# Altium PCB SG_CAN_Board2.PcbDoc (part 2 of 2)
Units mil, origin at the board's own origin, x right, y up, seen from the top; angles counter-clockwise.
Board outline 6000 x 2800 mil, 4 copper layers (Top Layer, Int1 (GND), Int2 (PWR), Bottom Layer), stack 53.911 mil thick; 153 components, 115 nets, 479 pads, 87 vias.
Unrouted connection lines stored in the file: 153.
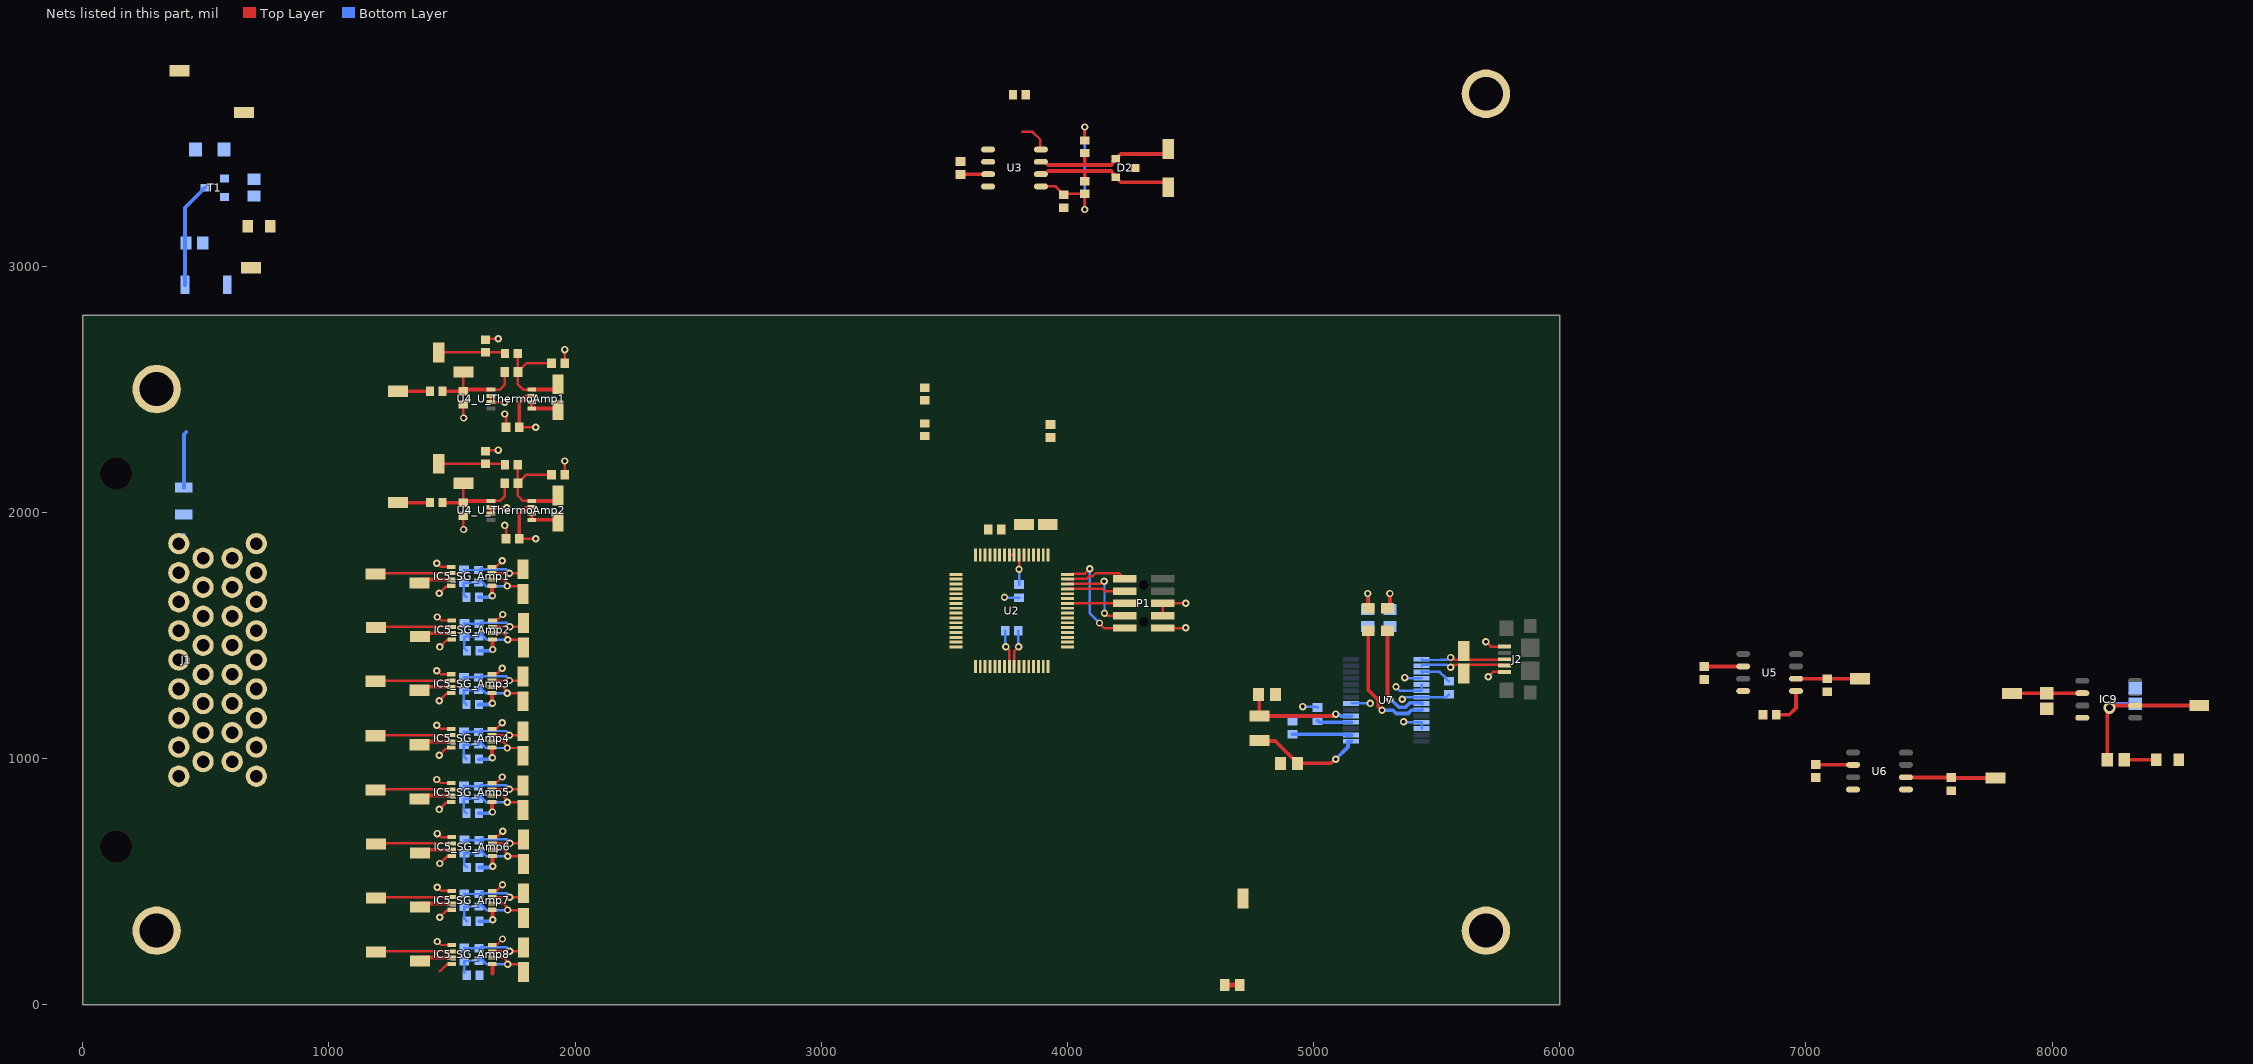
[diagram p4: the nets of this part, all layers, seen from the top]

## Part data
C5 C20 C21 C22 C24: library part 583, Dielectric=Ceramic, Manufacturer_id=1, Package="CAP 0603/1608", Voltage_Rating=25V, Created_By="Nick Mah", Created_Date=10/20/2018, Drawer_id=1, idCapacitor=583, Name="Cap_0.10uf_25V_CAP 0603/1608"
C6 C9_U_ThermoAmp1 C9_U_ThermoAmp2: library part 223, Dielectric=Ceramic, Manufacturer_id=1, Package="CAP 0603/1608", Voltage_Rating=16V, Created_By="Nick Mah", Created_Date=10/20/2018, Drawer_id=1, idCapacitor=223, Name="Cap_0.10uf_16V_CAP 0603/1608"
C7: library part 943, Dielectric=Ceramic, Manufacturer_id=1, Package="CAP 0603/1608", Voltage_Rating=50V, Created_By="Nick Mah", Created_Date=10/20/2018, Drawer_id=1, idCapacitor=943, Name="Cap_0.10uf_50V_CAP 0603/1608"
C8_U_ThermoAmp1 C8_U_ThermoAmp2 C12_U_ThermoAmp1 C12_U_ThermoAmp2: library part 193, Dielectric=Ceramic, Manufacturer_id=1, Package="CAP 0603/1608", Voltage_Rating=16V, Created_By="Nick Mah", Created_Date=10/20/2018, Drawer_id=1, idCapacitor=193, Name="Cap_1000pf_16V_CAP 0603/1608"
C10_U_ThermoAmp1 C10_U_ThermoAmp2: library part 217, Dielectric=Ceramic, Manufacturer_id=1, Package="CAP 0603/1608", Voltage_Rating=16V, Created_By="Nick Mah", Created_Date=10/20/2018, Drawer_id=1, idCapacitor=217, Name="Cap_0.010uf_16V_CAP 0603/1608"
C11: library part 929, Dielectric=Ceramic, Manufacturer_id=1, Package="CAP 0603/1608", Voltage_Rating=50V, Created_By="Nick Mah", Created_Date=10/20/2018, Drawer_id=1, idCapacitor=929, Name="Cap_4700pf_50V_CAP 0603/1608"
C13 C14: library part 589, Dielectric=Ceramic, Manufacturer_id=1, Package="CAP 0603/1608", Voltage_Rating=25V, Created_By="Nick Mah", Created_Date=10/20/2018, Drawer_id=1, idCapacitor=589, Name="Cap_1.0uf_25V_CAP 0603/1608"
C15 C17: library part 591, Dielectric=Ceramic, Manufacturer_id=1, Package="CAP 0603/1608", Voltage_Rating=25V, Created_By="Nick Mah", Created_Date=10/20/2018, Drawer_id=1, idCapacitor=591, Name="Cap_2.2uf_25V_CAP 0603/1608"
C16: library part 237, Dielectric=Ceramic, Manufacturer_id=1, Package="CAP 0603/1608", Voltage_Rating=16V, Created_By="Nick Mah", Created_Date=10/20/2018, Drawer_id=1, idCapacitor=237, Name="Cap_22uf_16V_CAP 0603/1608"
C18 C19: library part 711, Dielectric=Ceramic, Manufacturer_id=1, Package="CAP 0805/2012", Voltage_Rating=25V, Created_By="Nick Mah", Created_Date=10/20/2018, Drawer_id=1, idCapacitor=711, Name="Cap_2.2uf_25V_CAP 0805/2012"
C23: library part 529, Dielectric=Ceramic, Manufacturer_id=1, Package="CAP 0603/1608", Voltage_Rating=25V, Created_By="Nick Mah", Created_Date=10/20/2018, Drawer_id=1, idCapacitor=529, Name="Cap_100pf_25V_CAP 0603/1608"
C28_SG_Amp1 C28_SG_Amp2 C28_SG_Amp3 C28_SG_Amp4 C28_SG_Amp5 C28_SG_Amp6 C28_SG_Amp7 C28_SG_Amp8: library part 578, Dielectric=Ceramic, Manufacturer_id=1, Package="CAP 0603/1608", Voltage_Rating=25V, Created_By="Nick Mah", Created_Date=10/20/2018, Drawer_id=1, idCapacitor=578, Name="Cap_0.015uf_25V_CAP 0603/1608"
D1 D4 POWER1: library part 2, Manufacturer_id=1, Package=0805, Brightness=7mcd, Drawer_id=1, Id=20mA, idLED=2, Link=https://www.digikey.com/product-detail/en/visual-communications-company-vcc/CMD17-21VGD-TR8/L62505CT-ND/254936, Name=CMD17_0805_GREEN, Vf=2.1V
D2: library part 7, "ESD Protection Diode", Manufacturer_id=1, Package=SOT-23, Power=350W, Supplier1PartNo=NUP1105LT1GOSCT-ND, ComponentLink1URL=https://www.digikey.com/product-detail/en/on-semiconductor/NUP1105LT1G/NUP1105LT1GOSCT-ND/2122067, Drawer_id=1, Ic=8A, idDiode=7, Link=https://www.digikey.com/product-detail/en/on-semiconductor/NUP1105LT1G/NUP1105LT1GOSCT-ND/2122067, MfrPartNo=NUP1105LT1G, Name=SOT-23_350W_Zener, Num_Circuits=1, Supplier1=Digikey, Type=Zener
D3: library part 1, Package=0805, Drawer_id=1, idLED=1, Manufacturer_id=1, Name=LED_0805_RED, Vf=0.7V
D5: library part 12, "DIODE SCHOTTKY 30V 5A TMINIP2", Manufacturer_id=1, MfrPartNo=DB2431200L, Package=SOD-128, Power=30V, Supplier1PartNo=DB2431200LCT-ND, ComponentLink1Description=Datasheet, ComponentLink1URL=https://industrial.panasonic.com/content/data/SC/ds/ds4/DB2431200L_E.pdf, Drawer_id=1, Ic=5A, idDiode=12, Link=https://www.digikey.com/product-detail/en/panasonic-electronic-components/DB2431200L/DB2431200LCT-ND/3884430, Name=DB2431200L, Num_Circuits=1, Supplier1=Digi-Key, Type=Schottky
D6: library part 10, "Zener Diode 14V 500mW ±5% Surface Mount SOD-123", Manufacturer_id=8, Package=SOD-123, Power=500mW, Supplier1PartNo=DDZ9701-7DICT-ND, ComponentLink1Description=Datasheet, ComponentLink1URL=https://www.diodes.com/assets/Datasheets/ds30410.pdf, Drawer_id=1, idDiode=10, Link=https://www.digikey.com/product-detail/en/diodes-incorporated/DDZ9701-7/DDZ9701-7DICT-ND/3877402, MfrPartNo=DDZ9701-7, Name=DDZ9701, Num_Circuits=1, Supplier1=Digi-Key, Type=Zener
F1: library part 5, "Fuse", Manufacturer_id=1, MfrPartNo=1206L050/15YR, Created_By=Angel, Created_Date=10/27/2018, Drawer_id=1, I_hold=500mA, I_max=100A, I_trip=1A, idFuse=5, LatestRevisionDate=17-Jul-2002, LatestRevisionNote="Re-released for DXP Platform.", Link=https://www.digikey.com/product-detail/en/littelfuse-inc/1206L050-15YR/F3733CT-ND/2486168, Name="PTC Poly Fuse Resettable", PackageDescription="Thru-Hole; 2 Leads", PackageReference=PIN-W2/E2.8, Pd_Typ=600mW, Published=8-Jun-2000, Publisher="Altium Limited", V_max=15V
IC5_SG_Amp1 IC5_SG_Amp2 IC5_SG_Amp3 IC5_SG_Amp4 IC5_SG_Amp5 IC5_SG_Amp6 IC5_SG_Amp7 IC5_SG_Amp8: library part 2, Manufacturer_id=1, MfrPartNo=LTC2053, Package=MSOP8, Supply_Voltage="2.7V to ±5.5V", Amplifier_Type=Instrumentation, Created_By="Angel Delgado", Drawer_id=1, idOp_Amp=2, Link=https://www.digikey.com/product-detail/en/linear-technology-analog-devices/LTC2053CMS8-TRPBF/LTC2053CMS8-TRPBFCT-ND/5892339, Name="Instrumentation Amplifier", Num_Circuits=1
IC9: library part 10, "IC VREF SERIES 5V 8SOIC", Manufacturer_id=1, MfrPartNo=MAX6350CSA+, Package=SOIC-8, Created_By="Albert Panuco", Drawer_id=1, idPMIC_Lin=10, Link=https://www.digikey.com/product-detail/en/maxim-integrated/MAX6350CSA/MAX6350CSA-ND/1867176, Name=MAX6350CSA+_5V_Ref, Num_Outputs=1, Output_Config=5V, Updated_By="Albert Panuco", Vin(Max)=40V, Vout(Max)=12V
J1: library part 11, "Connector Header Through Hole, Right Angle 34 position 0.118\" (3.00mm)", Manufacturer_id=5, MfrPartNo=6437288-1, Supplier1PartNo=A124384-ND, Voltage_Rating=250VDC, ComponentLink1Description=Datasheet, ComponentLink1URL=https://www.te.com/commerce/DocumentDelivery/DDEController?Action=srchrtrv&DocNm=6437288-1&DocType=Customer+Drawing&DocLang=Japanese, Drawer_id=1, idConn=11, Link=https://www.digikey.com/products/en?mpart=6437288-1&&csp=WT.z_cid%3Dsp_8004_20120425_buynow%26TE_cid%3D8004-1541898693362, Name="AMP Superseal 34 POS", Num_Contacts=34, Num_Rows=4, Pitch=3mm, Supplier1=Digi-Key
J2: library part 5, "USB Micro Type B", Manufacturer_id=1, ComponentLink1Description=Datasheet, Created_By=Aiku, Created_Date=10/20/2018, Drawer_id=1, idConn=5, Link=https://www.mouser.com/ProductDetail/TE-Connectivity-AMP/1981568-1?qs=sGAEpiMZZMulM8LPOQ%252bykzEIUPbUCiSfqsfxH3Oq%252bYo%3d, MfrPartNo=1981568-1, Name="TE USB Micro", Num_Contacts=5, Supplier1=TE
N1 U2: library part 1, Drawer_id=1, Manufacturer_id=1
  N1: idFuse=3, idShunt=1, Name="Net Tie"
  U2: idMCU=1, Name="MKE18F512VLH16 MCU"
OVP_G1 PWR_IN1 PWR_OUT1 TEST_CANN1 TEST_CANP1 TEST_CANRX1 TEST_CANTX1 TEST_USBD_N1 TEST_USBD_P1 UART_RX1 UART_TX1: library part 5, Manufacturer_id=1, Package=0603, ComponentLink1Description=Datasheet, ComponentLink1URL=https://www.te.com/commerce/DocumentDelivery/DDEController?Action=srchrtrv&DocNm=1773266&DocType=DS&DocLang=English, Drawer_id=1, idTable=5, Link=https://www.digikey.com/product-detail/en/te-connectivity-amp-connectors/RCU-0C/A106145CT-ND/3477802, MfrPartNo=RCU-0C, Name=RCU-0C_Test_Point
P1: library part 4, "2 row connector", Manufacturer_id=1, Voltage_Rating=None, ComponentLink1Description=Datasheet, Created_By=Aiku, Drawer_id=1, idConn=4, Link=https://www.digikey.com/product-detail/en/5103309-1/A33160-ND/1114898?utm_campaign=buynow&WT.z_cid=ref_octopart_dkc_buynow&utm_medium=aggregator&curr=usd&site=us&utm_source=octopart, MfrPartNo=5103309-1, Name=CONN_TE_2X5POS, Num_Contacts=10, Num_Rows=2, Pitch=2.54mm
R4 R20_SG_Amp1 R20_SG_Amp2 R20_SG_Amp3 R20_SG_Amp4 R20_SG_Amp5 R20_SG_Amp6 R20_SG_Amp7 R20_SG_Amp8: library part 313, Manufacturer_id=1, Package=0603, Power=1/10W, Tolerance=1%, ComponentLink1Description=Datasheet, Created_By="Nick Mah", Created_Date=2018-10-20, Drawer_id=1, idResistor=313, Name=Res_10k_0603_1/10W_1%, Supplier 1=Digi-Key
R5: library part 1393, Manufacturer_id=1, Package=0603, Power=1/10W, Tolerance=5%, ComponentLink1Description=Datasheet, Created_By="Nick Mah", Created_Date=2018-10-20, Drawer_id=1, idResistor=1393, Name=Res_10k_0603_1/10W_5%, Supplier 1=Digi-Key
R6_U_ThermoAmp1 R6_U_ThermoAmp2 R11_U_ThermoAmp1 R11_U_ThermoAmp2: library part 2317, Manufacturer_id=1, Package=0603, Power=1/10W, Tolerance=10%, ComponentLink1Description=Datasheet, Created_By="Nick Mah", Created_Date=2018-10-20, Drawer_id=1, idResistor=2317, Name=Res_10k_0603_1/10W_10%, Supplier 1=Digi-Key
R7 R9 R15 R16: library part 721, Manufacturer_id=1, Package=0805, Power=1/4W, Tolerance=1%, ComponentLink1Description=Datasheet, Created_By="Nick Mah", Created_Date=2018-10-20, Drawer_id=1, idResistor=721, Name=Res_1.0k_0805_1/4W_1%, Supplier 1=Digi-Key
R8: library part 2293, Manufacturer_id=1, Package=0603, Power=1/10W, Tolerance=10%, ComponentLink1Description=Datasheet, Created_By="Nick Mah", Created_Date=2018-10-20, Drawer_id=1, idResistor=2293, Name=Res_100_0603_1/10W_10%, Supplier 1=Digi-Key
R10_U_ThermoAmp1 R10_U_ThermoAmp2: library part 1441, Manufacturer_id=1, Package=0603, Power=1/10W, Tolerance=5%, ComponentLink1Description=Datasheet, Created_By="Nick Mah", Created_Date=2018-10-20, Drawer_id=1, idResistor=1441, Name=Res_1.0M_0603_1/10W_5%, Supplier 1=Digi-Key
R12 R13: library part 1340, Manufacturer_id=1, Package=0603, Power=1/10W, Tolerance=5%, ComponentLink1Description=Datasheet, Created_By="Nick Mah", Created_Date=2018-10-20, Drawer_id=1, idResistor=1340, Name=Res_62_0603_1/10W_5%, Supplier 1=Digi-Key
R14 R34: library part 497, Manufacturer_id=1, Package=0805, Power=1/10W, Tolerance=1%, ComponentLink1Description=Datasheet, Created_By="Nick Mah", Created_Date=2018-10-20, Drawer_id=1, idResistor=497, Name=Res_470_0805_1/10W_1%, Supplier 1=Digi-Key
R24_SG_Amp1 R24_SG_Amp2 R24_SG_Amp3 R24_SG_Amp4 R24_SG_Amp5 R24_SG_Amp6 R24_SG_Amp7 R24_SG_Amp8: library part 241, Manufacturer_id=1, Package=0603, Power=1/10W, Tolerance=1%, ComponentLink1Description=Datasheet, Created_By="Nick Mah", Created_Date=2018-10-20, Drawer_id=1, idResistor=241, Name=Res_10_0603_1/10W_1%, Supplier 1=Digi-Key
R33: library part 545, Manufacturer_id=1, Package=0805, Power=1/10W, Tolerance=1%, ComponentLink1Description=Datasheet, Created_By="Nick Mah", Created_Date=2018-10-20, Drawer_id=1, idResistor=545, Name=Res_47k_0805_1/10W_1%, Supplier 1=Digi-Key
T1: library part 6, "MOSFET N-CHANNEL 30V 5A SOT23", Manufacturer_id=1, Package=SOT-23, Created_By=Angel, Drawer_id=1, Id=2.8A, idFETs=6, Link=https://www.digikey.com/product-detail/en/diodes-incorporated/DMG2302UK-7/DMG2302UK-7DICT-ND/6010163, MfrPartNo=DMG2302UK-7, Name=DMG2302UK-7, Num_Circuits=1, Rds_On=90mOhm, Supplier1=Digi-Key, Vdss=20V, Vgs(Max)=1V, Vgs(typ)=800mV
TP5_SG_Amp1 TP5_SG_Amp2 TP5_SG_Amp3 TP5_SG_Amp4 TP5_SG_Amp5 TP5_SG_Amp6 TP5_SG_Amp7 TP5_SG_Amp8 TP14_SG_Amp1 TP14_SG_Amp2 TP14_SG_Amp3 TP14_SG_Amp4 TP14_SG_Amp5 TP14_SG_Amp6 TP14_SG_Amp7 TP14_SG_Amp8 TP28_SG_Amp1 TP28_SG_Amp2 TP28_SG_Amp3 TP28_SG_Amp4 TP28_SG_Amp5 TP28_SG_Amp6 TP28_SG_Amp7 TP28_SG_Amp8 TP30_SG_Amp1 TP30_SG_Amp2 TP30_SG_Amp3 TP30_SG_Amp4 TP30_SG_Amp5 TP30_SG_Amp6 TP30_SG_Amp7 TP30_SG_Amp8 TP38_U_ThermoAmp1 TP38_U_ThermoAmp2 TP39_U_ThermoAmp1 TP39_U_ThermoAmp2 TP40 TP41_U_ThermoAmp1 TP41_U_ThermoAmp2 TP42_U_ThermoAmp1 TP42_U_ThermoAmp2 TP43_U_ThermoAmp1 TP43_U_ThermoAmp2 TP44 TP45 TP46 TP47: library part 14, "Test point", Manufacturer_id=1, Supplier1PartNo=None, ComponentLink1Description=Null, ComponentLink1URL=Null, Created_By=Graydon, Created_Date=11/10/2018, Drawer_id=1, idConn=14, Link=https://www.digikey.com/product-detail/en/te-connectivity-amp-connectors/RCU-0C/A106145CT-ND/3477802, MfrPartNo=RCU-0C, Name=RCU-0C, Num_Contacts=1, Num_Rows=1, Package=RCU-0C, Supplier1=None, Updated_By=Null
U3: library part 5, Manufacturer_id=1, MfrPartNo=MCP2561, Package=SOIC-8, Created_By="Angel Delgado", Data_Rate=1Mbps, Drawer_id=1, idIC_Interface=5, Link=https://www.digikey.com/product-detail/en/microchip-technology/MCP2561T-E-SN/MCP2561T-E-SNCT-ND/5148846, Name="CAN Transceiver", Num_Circuits=1, Protocol=CAN, Type=Transceiver, Vin(Max)=5.5V, Vin(Min)=4.5V
U4_U_ThermoAmp1 U4_U_ThermoAmp2: library part 3, "IC THRMOCPLE COLD JNC COMP 8MSOP", Manufacturer_id=1, MfrPartNo=AD8494CRMZ, Package=MSOP8, Supplier1PartNo=AD8494CRMZ-ND, Supply_Voltage=+-18,2.7-36, Amplifier_Type="Thermocouple Amplifier", ComponentLink1Description=Datasheet, ComponentLink1URL=http://www.digchip.com/data/041/041-93390-AD8494.pdf, Created_By="Nick Mah", Drawer_id=1, idOp_Amp=3, Link=https://www.digikey.com/product-detail/en/analog-devices-inc/AD8494CRMZ/AD8494CRMZ-ND/2606669, Name="AD8494 Thermocouple Amplifier", Num_Circuits=1, Supplier1=Digi-Key
U5: library part 9, "Series Voltage Reference IC ±0.1% 10mA 8-SOIC", Current_Rating=10mA, Dropout_Voltage=200mV, Manufacturer_id=1, MfrPartNo=REF5025AIDR, Package=SOIC-8, Power=Reference, Supplier1PartNo=296-39165-2-ND, ComponentLink1Description=Datasheet, ComponentLink1URL=http://www.ti.com/lit/ds/symlink/ref5020.pdf, Drawer_id=1, idPMIC_Lin=9, Link=https://www.digikey.com/product-detail/en/texas-instruments/REF5025AIDR/296-39165-2-ND/1900163, Name=REF5025_2.5V_Reg, Num_Outputs=1, Supplier1=Digi-Key, Vin(Max)=18V, Vin(Min)=2.7V, Vout(Max)=2.5V, Vout(Min)=2.5V, Vout_Type=Fixed
U6: library part 2, Manufacturer_id=1, Drawer_id=1, idIC_Misc=2, Name="Voltage Ref LT1236-5"
U7: library part 3, Manufacturer_id=1, Created_By=Kyle, Drawer_id=1, idIC_Interface=3, Link=https://www.digikey.com/product-detail/en/ftdi-future-technology-devices-international-ltd/FT232RL-REEL/768-1007-1-ND/1836402, MfrPartNo=FT232RL, Name="USB FTDI", Protocol=UART, Vin(Max)=5.25, Vin(Min)=3.3

## Free pads (board coordinates)
  round 196.85 hole 137.8: 1(300,300) 1(300,2500) 1(5700,300) 1(5700,3700)

## Via types
v1: diameter 30, hole 15, Top Layer to Bottom Layer, 86 vias
v2: diameter 50, hole 28, Top Layer to Bottom Layer, 1 vias

## Nets (pads, with @x,y where several pads share a name; then routed paths per layer and width w, separated by ;. In a path a pad name is that pad's centre, name@x,y a point inside that pad or via, vN(x,y) a via of type N, cw(c..) or ccw(c..) an arc to the next point about the centre after c; other vN are vias at no path point)
2.5VREF: C16.2 IC5_SG_Amp1.5 IC5_SG_Amp2.5 IC5_SG_Amp3.5 IC5_SG_Amp4.5 IC5_SG_Amp5.5 IC5_SG_Amp6.5 IC5_SG_Amp7.5 IC5_SG_Amp8.5 R24_SG_Amp1.1 R24_SG_Amp2.1 R24_SG_Amp3.1 R24_SG_Amp4.1 R24_SG_Amp5.1 R24_SG_Amp6.1 R24_SG_Amp7.1 R24_SG_Amp8.1 TP44.1 U5.6 | length 988.2
  Top Layer w15: IC5_SG_Amp5.5@1662.24,823.23 1662.24,783.8 v1(1663.88,782.17) ; IC5_SG_Amp4.5@1662.24,1043.3 1662.24,1003.87 v1(1663.88,1002.24) ; IC5_SG_Amp3.5@1662.24,1265.08 1662.24,1225.65 v1(1663.88,1224.02) ; IC5_SG_Amp1.5@1662.24,1701.22 1662.24,1661.79 v1(1663.88,1660.15) ; 1663.88,125.65 IC5_SG_Amp8.5@1663.88,165.08 ; IC5_SG_Amp7.5@1663.88,385.08 1663.88,345.65 v1(1665.51,344.02) ; IC5_SG_Amp6.5@1664.17,603.3 1664.17,563.87 v1(1665.81,562.24) ; IC5_SG_Amp2.5@1664.17,1483.3 1664.17,1443.87 v1(1665.81,1442.24) ; U5.6@6959.88,1323.58 C16.2@7086.57,1323.58 TP44.1@7220.36,1323.58
  Bottom Layer w15: R24_SG_Amp5.1@1609.47,776.89 1654.55,776.89 1659.82,782.17 v1(1663.88,782.17) ; R24_SG_Amp4.1@1609.47,996.96 1654.55,996.96 1659.82,1002.24 v1(1663.88,1002.24) ; R24_SG_Amp3.1@1609.47,1218.74 1654.55,1218.74 1659.82,1224.02 v1(1663.88,1224.02) ; R24_SG_Amp1.1@1609.47,1654.88 1654.55,1654.88 1659.82,1660.15 v1(1663.88,1660.15) ; R24_SG_Amp7.1@1611.1,338.74 1656.18,338.74 1661.45,344.02 v1(1665.51,344.02) ; R24_SG_Amp6.1@1611.4,556.96 1656.48,556.96 1661.75,562.24 v1(1665.81,562.24) ; R24_SG_Amp2.1@1611.4,1436.96 1656.48,1436.96 1661.75,1442.24 v1(1665.81,1442.24)
12V_Unfused: F1.1 J1.A26 PWR_IN1.1 | length 33.1
  Bottom Layer w15: J1.A26@409.13,1890.82 J1.A26@409.13,1907.4 ; J1.A26@410.71,1890.82 J1.A26@410.71,1907.4
+12: C15.2 C18.2 D5.2 D6.2 F1.2 IC9.2 PWR_OUT1.1 R34.2 T1.3 TP46.1 U6.2 | length 1096.8
  Top Layer w15: C15.2@7040,975.16 7041.57,973.58 U6.2@7191.81,973.58 ; TP46.1@7837.84,1263.58 7839.33,1265.08 C18.2@7977.84,1265.08 7977.92,1265 IC9.2@8122.72,1265
  Bottom Layer w15: F1.2@410.71,2100.63 410.71,2315.67 420.55,2325.51 ; D5.2@415.31,2923.42 415.31,3237.16 486.36,3308.21 486.36,3310.18 494.61,3318.42 T1.3@496.57,3318.42
+IN_U_ThermoAmp1: C10_U_ThermoAmp1.2 C12_U_ThermoAmp1.1 R11_U_ThermoAmp1.1 TP43_U_ThermoAmp1.1 U4_U_ThermoAmp1.8 | length 463.4
  Top Layer w10: R11_U_ThermoAmp1.1@1766.48,2645 1766.48,2570.98 C10_U_ThermoAmp1.2@1767.46,2570 ; U4_U_ThermoAmp1.8@1823.78,2498.39 1788.53,2498.39 1767.46,2519.45 C10_U_ThermoAmp1.2@1767.46,2570 ; C12_U_ThermoAmp1.1@1904.31,2605 1802.46,2605 1782.15,2584.69 1780.18,2584.69 1767.46,2571.97 C10_U_ThermoAmp1.2@1767.46,2570
  Top Layer w15: U4_U_ThermoAmp1.8@1823.78,2498.39 1915.75,2498.39 1930.89,2513.52 TP43_U_ThermoAmp1.1@1930.89,2520
+IN_U_ThermoAmp2: C10_U_ThermoAmp2.2 C12_U_ThermoAmp2.1 R11_U_ThermoAmp2.1 TP43_U_ThermoAmp2.1 U4_U_ThermoAmp2.8 | length 463.4
  Top Layer w10: R11_U_ThermoAmp2.1@1766.48,2192.44 1766.48,2118.43 C10_U_ThermoAmp2.2@1767.46,2117.44 ; U4_U_ThermoAmp2.8@1823.78,2045.83 1788.53,2045.83 1767.46,2066.89 C10_U_ThermoAmp2.2@1767.46,2117.44 ; C12_U_ThermoAmp2.1@1904.31,2152.44 1802.46,2152.44 1782.15,2132.13 1780.18,2132.13 1767.46,2119.41 C10_U_ThermoAmp2.2@1767.46,2117.44
  Top Layer w15: U4_U_ThermoAmp2.8@1823.78,2045.83 1915.75,2045.83 1930.89,2060.96 TP43_U_ThermoAmp2.1@1930.89,2067.44
-IN_U_ThermoAmp1: C8_U_ThermoAmp1.2 C10_U_ThermoAmp1.1 R6_U_ThermoAmp1.2 TP41_U_ThermoAmp1.1 U4_U_ThermoAmp1.1 | length 394
  Top Layer w10: C8_U_ThermoAmp1.2@1545.89,2491.57 TP41_U_ThermoAmp1.1@1545.89,2570 ; U4_U_ThermoAmp1.1@1658,2498.39 1694.28,2498.39 1714.31,2518.43 C10_U_ThermoAmp1.1@1714.31,2570
  Top Layer w15: R6_U_ThermoAmp1.2@1461.48,2491.57 C8_U_ThermoAmp1.2@1545.89,2491.57 1552.7,2498.39 U4_U_ThermoAmp1.1@1658,2498.39
-IN_U_ThermoAmp2: C8_U_ThermoAmp2.2 C10_U_ThermoAmp2.1 R6_U_ThermoAmp2.2 TP41_U_ThermoAmp2.1 U4_U_ThermoAmp2.1 | length 394
  Top Layer w10: C8_U_ThermoAmp2.2@1545.89,2039.02 TP41_U_ThermoAmp2.1@1545.89,2117.44 ; U4_U_ThermoAmp2.1@1658,2045.83 1694.28,2045.83 1714.31,2065.87 C10_U_ThermoAmp2.1@1714.31,2117.44
  Top Layer w15: R6_U_ThermoAmp2.2@1461.48,2039.02 C8_U_ThermoAmp2.2@1545.89,2039.02 1552.7,2045.83 U4_U_ThermoAmp2.1@1658,2045.83
AGND: C8_U_ThermoAmp1.1 C8_U_ThermoAmp2.1 C9_U_ThermoAmp1.1 C9_U_ThermoAmp2.1 C12_U_ThermoAmp1.2 C12_U_ThermoAmp2.2 C13.1 C14.1 C16.1 C18.1 C19.1 C24.1 D4.2 IC5_SG_Amp1.1 IC5_SG_Amp1.4 IC5_SG_Amp2.1 IC5_SG_Amp2.4 IC5_SG_Amp3.1 IC5_SG_Amp3.4 IC5_SG_Amp4.1 IC5_SG_Amp4.4 IC5_SG_Amp5.1 IC5_SG_Amp5.4 IC5_SG_Amp6.1 IC5_SG_Amp6.4 IC5_SG_Amp7.1 IC5_SG_Amp7.4 IC5_SG_Amp8.1 IC5_SG_Amp8.4 IC9.4 J1.A23 J1.A24 J1.A33 J1.A34 N1.1 pad.1@300,300 pad.1@300,2500 R10_U_ThermoAmp1.1 R10_U_ThermoAmp2.1 TP40.1 U2.10 U4_U_ThermoAmp1.2 U4_U_ThermoAmp1.3 U4_U_ThermoAmp2.2 U4_U_ThermoAmp2.3 U5.4 | length 1623.2
  Top Layer w10: v1(1438.36,914.41) 1439.82,914.41 1454.22,900 IC5_SG_Amp5.1@1496.46,900 ; v1(1438.36,1134.48) 1439.82,1134.48 1454.22,1120.07 IC5_SG_Amp4.1@1496.46,1120.07 ; v1(1438.36,1356.26) 1439.82,1356.26 1454.22,1341.85 IC5_SG_Amp3.1@1496.46,1341.85 ; v1(1438.36,1792.39) 1439.82,1792.39 1454.22,1777.99 IC5_SG_Amp1.1@1496.46,1777.99 ; v1(1440,256.26) 1441.45,256.26 1455.86,241.85 IC5_SG_Amp8.1@1498.09,241.85 ; v1(1440,476.26) 1441.45,476.26 1455.86,461.85 IC5_SG_Amp7.1@1498.09,461.85 ; v1(1440.3,694.48) 1441.75,694.48 1456.15,680.07 IC5_SG_Amp6.1@1498.39,680.07 ; v1(1440.3,1574.48) 1441.75,1574.48 1456.15,1560.07 IC5_SG_Amp2.1@1498.39,1560.07 ; v1(1448.36,792.64) 1475.69,819.96 1493.19,819.96 IC5_SG_Amp5.4@1496.46,823.23 ; v1(1448.36,1012.71) 1475.69,1040.03 1493.19,1040.03 IC5_SG_Amp4.4@1496.46,1043.3 ; v1(1448.36,1234.49) 1475.69,1261.81 1493.19,1261.81 IC5_SG_Amp3.4@1496.46,1265.08 ; v1(1448.36,1670.62) 1475.69,1697.95 1493.19,1697.95 IC5_SG_Amp1.4@1496.46,1701.22 ; 1450,134.49 1477.32,161.81 1494.82,161.81 IC5_SG_Amp8.4@1498.09,165.08 ; v1(1450,354.49) 1477.32,381.81 1494.82,381.81 IC5_SG_Amp7.4@1498.09,385.08 ; v1(1450.3,572.71) 1477.62,600.03 1495.12,600.03 IC5_SG_Amp6.4@1498.39,603.3 ; v1(1450.3,1452.71) 1477.62,1480.03 1495.12,1480.03 IC5_SG_Amp2.4@1498.39,1483.3 ; C8_U_ThermoAmp2.1@1545.89,1985.87 1545.89,1938.19 1546.7,1937.38 v1(1546.7,1929.96) ; C8_U_ThermoAmp1.1@1545.89,2438.43 1545.89,2390.75 1546.7,2389.94 v1(1546.7,2382.52) ; R10_U_ThermoAmp2.1@1635.89,2248.03 1640.3,2252.44 v1(1687.75,2252.44) ; R10_U_ThermoAmp1.1@1635.89,2700.59 1640.3,2705 v1(1687.75,2705) ; U4_U_ThermoAmp2.2@1658,2020.24 U4_U_ThermoAmp2.3@1658,1994.65 1681.76,2018.41 v1(1722.19,2018.41) ; U4_U_ThermoAmp1.2@1658,2472.8 U4_U_ThermoAmp1.3@1658,2447.2 v1(1714,2447.2) ; v1(1714.31,1946.42) 1714.31,1941.01 1719.31,1936.01 C9_U_ThermoAmp2.1@1719.31,1892.44 ; v1(1714.31,2398.98) 1714.31,2393.56 1719.31,2388.56 C9_U_ThermoAmp1.1@1719.31,2345 ; C12_U_ThermoAmp2.2@1957.46,2152.44 v1(1957.47,2208.19) ; C12_U_ThermoAmp1.2@1957.46,2605 v1(1957.47,2660.75)
CAN_N: D2.2 J1.A17 R12.1 TEST_CANN1.1 U3.6 | length 605.5
  Top Layer w15: U3.6@3892.17,3373.43 3909.5,3373.43 3922,3385.93 4070.47,3385.93 ; R12.1@4070.47,3344.96 4070.47,3385.93 ; TEST_CANN1.1@4409.27,3320.27 4409.74,3319.8 TEST_CANN1.1@4409.74,3304.65 ; TEST_CANN1.1@4410,3335 4404.55,3340.45 4216.67,3340.45 D2.2@4196.1,3361.02 4194.13,3361.02 4185.89,3369.27 4185.89,3377.14 4177.1,3385.93 4118.87,3385.93 4070.47,3385.93
CAN_P: D2.1 J1.A25 R13.2 TEST_CANP1.1 U3.7 | length 617.3
  Top Layer w15: U3.7@3892.17,3423.43 3909.5,3423.43 3922,3410.93 4006.28,3410.93 4070.47,3410.93 ; R13.2@4070.47,3458.78 4070.47,3410.93 ; D2.1@4185.89,3444.07 D2.1@4194.13,3435.83 ; 4216.19,3455 4205.27,3444.07 4204.35,3444.07 D2.1@4196.1,3435.83 D2.1@4194.13,3435.83 ; 4216.19,3455.45 4279.94,3455.45 ; 4279.94,3455 4280.39,3455.45 4395.33,3455.45 4410.47,3470.59 TEST_CANP1.1@4410.47,3475.59 ; 4070.47,3410.93 4108.51,3410.93 4177.1,3410.93 4185.89,3419.71 4185.89,3427.58 D2.1@4194.13,3435.83
D_N: J2.2 TEST_USBD_N1.1 U7.16 | length 378.1
  Top Layer w10: v1(5556.47,1369.79) 5561.88,1369.79 5571.88,1379.79 5586.5,1379.79 5586.88,1379.42 5592.36,1379.42 TEST_USBD_N1.1@5610,1361.78 ; TEST_USBD_N1.1@5610,1344.06 TEST_USBD_N1.1@5610,1361.78 ; J2.2@5774.68,1377.17 5771.89,1379.96 5694.81,1379.96 5694.65,1379.79 5633.5,1379.79 5633.12,1379.42 5627.64,1379.42 TEST_USBD_N1.1@5610,1361.78
  Bottom Layer w10: U7.16@5440,1376.77 5442.8,1379.57 5522.18,1379.57 5522.41,1379.79 5541.06,1379.79 5551.06,1369.79 v1(5556.47,1369.79)
D_P: J2.3 TEST_USBD_P1.1 U7.15 | length 378.1
  Top Layer w10: v1(5556.47,1409.79) 5561.88,1409.79 5571.88,1399.79 5586.5,1399.79 5586.88,1400.17 5592.36,1400.17 TEST_USBD_P1.1@5610,1417.81 ; TEST_USBD_P1.1@5610,1435.53 TEST_USBD_P1.1@5610,1417.81 ; J2.3@5774.68,1402.76 5771.89,1399.96 5686.53,1399.96 5686.36,1399.79 5633.5,1399.79 5633.12,1400.17 5627.64,1400.17 TEST_USBD_P1.1@5610,1417.81
  Bottom Layer w10: U7.15@5440,1402.36 5442.8,1399.57 5513.9,1399.57 5514.12,1399.79 5541.06,1399.79 5551.06,1409.79 v1(5556.47,1409.79)
DGND: C5.1 C6.1 C7.1 C11.1 C15.1 C17.1 C20.1 C21.1 C23.1 D2.3 D5.1 J1.A22 J1.A31 J1.A32 J2.5 N1.2 P1.3 P1.5 pad.1@5700,300 pad.1@5700,3700 POWER1.2 R8.1 R33.1 T1.2 U2.40 U3.2 U6.4 U6.5 U7.7 U7.18 U7.21 U7.25 U7.26 | length 945
  Top Layer w10: v1(3750,1453.94) 3750,1452.02 3763.94,1438.08 U2.40@3763.94,1373.62 ; P1.3@4386.77,1579.53 P1.5@4386.77,1629.53 4479.53,1629.53 v1(4480,1630) ; v1(5700,1474.13) 5720.19,1453.94 J2.5@5774.68,1453.94
  Bottom Layer w10: v1(3744.26,1654.88) 3746.18,1652.95 C5.1@3803.31,1652.95 ; C23.1@3747.21,1518.11 3747.21,1456.73 v1(3750,1453.94) ; v1(4956.14,1210.43) 5012.29,1210.43 C21.1@5016.14,1206.57 ; U7.7@5154.57,1223.23 v1(5230,1223.23) ; v1(5360,1240) 5365.41,1240 5374.23,1248.82 U7.21@5437.85,1248.82 5538.82,1248.82 C20.1@5550,1260 ; v1(5365.41,1148.22) 5367.18,1146.46 5440,1146.46 U7.26@5440,1120.87 ; v1(5370,1328.16) 5372.57,1325.59 U7.18@5440,1325.59
DVCC_5V: C5.2 C6.2 C7.2 C9_U_ThermoAmp1.2 C9_U_ThermoAmp2.2 C13.2 C19.2 C21.2 C23.2 IC9.6 J2.1 P1.1 R4.2 R5.2 R14.1 R15.2 R16.2 TP47.1 U2.7 U2.41 U3.3 U4_U_ThermoAmp1.7 U4_U_ThermoAmp2.7 U5.2 U7.4 U7.19 U7.20 | length 2140.7
  Top Layer w10: C9_U_ThermoAmp2.2@1772.46,1892.44 v1(1840,1892.45) ; C9_U_ThermoAmp1.2@1772.46,2345 v1(1840,2345.01) ; U2.41@3783.63,1373.62 3783.63,1436.07 v1(3801.5,1453.94) ; v1(3803.31,1768.3) U2.7@3803.31,1826.38 ; P1.1@4386.77,1529.53 4478.43,1529.53 v1(4480,1531.1) ; v1(5710,1332.17) 5729.41,1351.57 J2.1@5774.68,1351.57
  Top Layer w15: C9_U_ThermoAmp2.2@1772.46,1892.44 1772.46,1991.01 1799.86,2018.41 1812.73,2018.41 1814.55,2020.24 U4_U_ThermoAmp2.7@1823.78,2020.24 ; C9_U_ThermoAmp1.2@1772.46,2345 1772.46,2443.57 1799.86,2470.97 1812.73,2470.97 1814.55,2472.8 U4_U_ThermoAmp1.7@1823.78,2472.8 ; C7.2@3565.47,3371.85 3567.05,3373.43 U3.3@3677.6,3373.43 ; C13.2@6586.57,1373.58 U5.2@6745.32,1373.58 ; R14.1@8224.09,994.25 8224.09,1196.18 v2(8233.5,1205.59) 8242.91,1215 IC9.6@8337.28,1215 TP47.1@8597.84,1215
  Bottom Layer w10: C23.2@3800.36,1518.11 3800.36,1455.08 v1(3801.5,1453.94) ; C5.2@3803.31,1706.1 v1(3803.31,1768.3) ; v1(5334.61,1290.67) 5350.87,1274.41 U7.20@5437.85,1274.41 ; U7.20@5440,1274.41 U7.19@5440,1300
  Bottom Layer w15: C21.2@5016.14,1153.43 5023.11,1146.46 U7.4@5154.57,1146.46 ; v2(8233.5,1205.59) 8242.97,1205.59 8259.16,1221.77 C19.2@8337.28,1221.77
FTDI_GREEN: D1.2 U7.23 | length 520.1
  Top Layer w15: D1.2@5222.48,1518.86 5222.48,1276.71 5262.5,1236.69 5262.5,1210.77 v1(5277.6,1195.67)
  Bottom Layer w15: v1(5277.6,1195.67) 5323.01,1195.67 5336.18,1182.5 5383.82,1182.5 5396.99,1195.67 5438.03,1195.67 U7.23@5440,1197.64
FTDI_RED: D3.2 U7.22 | length 434.8
  Top Layer w15: D3.2@5300,1518.86 5300,1254.37 5310,1244.37 v1(5310,1240.31)
  Bottom Layer w15: v1(5310,1240.31) 5313.72,1240.31 5346.54,1207.5 5373.46,1207.5 5391.64,1225.67 5406.23,1225.67 5406.53,1225.37 5437.85,1225.37 U7.22@5440,1223.23
FTDI_UART_RX: R7.2 U2.47
FTDI_UART_TX: R9.2 U2.48
JTAG_RST: C22.2 P1.10 R5.1 U2.63 | length 252.7
  Top Layer w10: U2.63@4000.16,1727.95 4023.79,1727.95 4025.36,1729.53 4077.81,1729.53 4088.28,1740 4102.43,1740 4114.82,1752.4 4210.36,1752.4 P1.10@4233.23,1729.53
JTAG_TCLK: P1.4 U2.62 | length 371.2
  Top Layer w10: U2.62@4000.16,1708.27 4000.48,1708.58 4132.88,1708.58 4144.3,1720 v1(4148.74,1720) ; v1(4150.47,1590) 4151.42,1590 4161.89,1579.53 P1.4@4233.23,1579.53
  Bottom Layer w10: v1(4148.74,1720) 4150.47,1718.27 v1(4150.47,1590)
JTAG_TDI: P1.8 U2.61 | length 236.8
  Top Layer w10: U2.61@4000.16,1688.58 4141.42,1688.58 4150.47,1679.53 P1.8@4233.23,1679.53
JTAG_TDO: P1.6 U2.58 | length 233.1
  Top Layer w10: U2.58@4000.16,1629.53 P1.6@4233.23,1629.53
JTAG_TMS: P1.2 R4.1 U2.64 | length 448.3
  Top Layer w10: U2.64@4000.16,1747.95 4015.5,1747.95 4017.08,1749.53 4069.53,1749.53 v1(4090,1770) ; v1(4130,1550) 4130,1548.27 4148.74,1529.53 P1.2@4233.23,1529.53
  Bottom Layer w10: v1(4090,1770) 4090,1590 v1(4130,1550)
NetC22_1: C22.1 U7.2 | length 241.6
  Bottom Layer w15: C22.1@4913.94,1097.56 5129.45,1097.56 5131.73,1095.28 U7.2@5154.57,1095.28
NetD1_1: D1.1 R16.1 | length 117.1
  Top Layer w15: v1(5220,1670) 5220,1611.89 D1.1@5222.48,1609.41
  Bottom Layer w15: R16.1@5220,1604.53 v1@5220,1660
NetD3_1: D3.1 R15.1 | length 120.2
  Top Layer w15: D3.1@5300,1609.41 5310,1619.41 v1(5310,1670)
  Bottom Layer w15: R15.1@5310,1604.53 v1@5310,1660
NetD6_1: D6.1 OVP_G1.1 R33.2 T1.1
NetPOWER1_1: POWER1.1 R34.1
NetR7_1: R7.1 U7.5 UART_RX1.1 | length 452.1
  Top Layer w15: R7.1@4780,1255.55 4779.72,1255.28 4779.72,1172.32 UART_RX1.1@4780,1172.05 v1@5080,1172.05
  Bottom Layer w15: v1(5090,1180) 5092.87,1177.13 5105.12,1177.13 5110.79,1171.46 5153.98,1171.46 U7.5@5154.57,1172.05
NetR9_1: R9.1 U7.1 UART_TX1.1 | length 471.7
  Top Layer w15: UART_TX1.1@4780,1073.23 4777.36,1070.59 4843.85,1070.59 4915.37,999.07 4919.31,999.07 4934.45,983.94 R9.1@4934.45,980 5070.32,980 v1@5090,999.69
  Bottom Layer w15: v1(5090,996.34) 5139.99,1046.33 5139.99,1067.54 5142.13,1069.69 U7.1@5154.57,1069.69
NetU2_1: U2.1
NetU2_2: U2.2
NetU2_3: U2.3
NetU2_4: U2.4
NetU2_11: U2.11
NetU2_12: U2.12
NetU2_13: U2.13
NetU2_14: U2.14
NetU2_15: U2.15
NetU2_16: U2.16
NetU2_17: U2.17
NetU2_18: U2.18
NetU2_19: U2.19
NetU2_20: U2.38
NetU2_21: U2.49
NetU2_22: U2.22
NetU2_23: U2.23
NetU2_24: U2.24
NetU2_27: U2.34
NetU2_28: U2.37
NetU2_29: U2.50
NetU2_30: U2.33
NetU2_35: U2.35
NetU2_36: U2.36
NetU2_39: U2.39
NetU2_42: U2.42
NetU2_43: U2.43
NetU2_44: U2.44
NetU2_45: U2.45
NetU2_46: U2.46
NetU2_51: U2.51
NetU2_52: U2.52
NetU2_53: U2.53
NetU2_54: U2.54
NetU2_55: U2.55
NetU2_56: U2.56
NetU2_57: U2.57
NetU2_59: U2.59
NetU2_60: U2.60
RG_SG_Amp1: C28_SG_Amp1.1 IC5_SG_Amp1.6 R20_SG_Amp1.1 R24_SG_Amp1.2 TP28_SG_Amp1.1 | length 401.2
  Top Layer w10: IC5_SG_Amp1.6@1662.24,1726.81 1707.06,1726.81 1723.88,1709.99 v1(1723.88,1700.08) 1770.73,1700.08 TP28_SG_Amp1.1@1788.36,1682.44
  Bottom Layer w10: R24_SG_Amp1.2@1558.29,1654.88 1548.37,1664.8 C28_SG_Amp1.1@1548.37,1713.03 1606.91,1713.03 R20_SG_Amp1.1@1607.89,1714.01 1616.28,1722.4 1638.59,1700.08 v1(1723.88,1700.08)
RG_SG_Amp2: C28_SG_Amp2.1 IC5_SG_Amp2.6 R20_SG_Amp2.1 R24_SG_Amp2.2 TP28_SG_Amp2.1 | length 401.2
  Top Layer w10: IC5_SG_Amp2.6@1664.17,1508.89 1708.99,1508.89 1725.81,1492.07 v1(1725.81,1482.17) 1772.66,1482.17 TP28_SG_Amp2.1@1790.3,1464.53
  Bottom Layer w10: R24_SG_Amp2.2@1560.22,1436.96 1550.3,1446.89 C28_SG_Amp2.1@1550.3,1495.12 1608.84,1495.12 R20_SG_Amp2.1@1609.82,1496.1 1618.21,1504.48 1640.52,1482.17 v1(1725.81,1482.17)
RG_SG_Amp3: C28_SG_Amp3.1 IC5_SG_Amp3.6 R20_SG_Amp3.1 R24_SG_Amp3.2 TP28_SG_Amp3.1 | length 401.2
  Top Layer w10: IC5_SG_Amp3.6@1662.24,1290.67 1707.06,1290.67 1723.88,1273.85 v1(1723.88,1263.95) 1770.73,1263.95 TP28_SG_Amp3.1@1788.36,1246.31
  Bottom Layer w10: R24_SG_Amp3.2@1558.29,1218.74 1548.37,1228.67 C28_SG_Amp3.1@1548.37,1276.9 1606.91,1276.9 R20_SG_Amp3.1@1607.89,1277.88 1616.28,1286.26 1638.59,1263.95 v1(1723.88,1263.95)
RG_SG_Amp4: C28_SG_Amp4.1 IC5_SG_Amp4.6 R20_SG_Amp4.1 R24_SG_Amp4.2 TP28_SG_Amp4.1 | length 401.2
  Top Layer w10: IC5_SG_Amp4.6@1662.24,1068.89 1707.06,1068.89 1723.88,1052.07 v1(1723.88,1042.17) 1770.73,1042.17 TP28_SG_Amp4.1@1788.36,1024.53
  Bottom Layer w10: R24_SG_Amp4.2@1558.29,996.96 1548.37,1006.89 C28_SG_Amp4.1@1548.37,1055.12 1606.91,1055.12 R20_SG_Amp4.1@1607.89,1056.1 1616.28,1064.48 1638.59,1042.17 v1(1723.88,1042.17)
RG_SG_Amp5: C28_SG_Amp5.1 IC5_SG_Amp5.6 R20_SG_Amp5.1 R24_SG_Amp5.2 TP28_SG_Amp5.1 | length 401.2
  Top Layer w10: IC5_SG_Amp5.6@1662.24,848.82 1707.06,848.82 1723.88,832 v1(1723.88,822.1) 1770.73,822.1 TP28_SG_Amp5.1@1788.36,804.46
  Bottom Layer w10: R24_SG_Amp5.2@1558.29,776.89 1548.37,786.82 C28_SG_Amp5.1@1548.37,835.05 1606.91,835.05 R20_SG_Amp5.1@1607.89,836.03 1616.28,844.41 1638.59,822.1 v1(1723.88,822.1)
RG_SG_Amp6: C28_SG_Amp6.1 IC5_SG_Amp6.6 R20_SG_Amp6.1 R24_SG_Amp6.2 TP28_SG_Amp6.1 | length 401.2
  Top Layer w10: IC5_SG_Amp6.6@1664.17,628.89 1708.99,628.89 1725.81,612.07 v1(1725.81,602.17) 1772.66,602.17 TP28_SG_Amp6.1@1790.3,584.53
  Bottom Layer w10: R24_SG_Amp6.2@1560.22,556.96 1550.3,566.89 C28_SG_Amp6.1@1550.3,615.12 1608.84,615.12 R20_SG_Amp6.1@1609.82,616.1 1618.21,624.48 1640.52,602.17 v1(1725.81,602.17)
RG_SG_Amp7: C28_SG_Amp7.1 IC5_SG_Amp7.6 R20_SG_Amp7.1 R24_SG_Amp7.2 TP28_SG_Amp7.1 | length 401.2
  Top Layer w10: IC5_SG_Amp7.6@1663.88,410.67 1708.69,410.67 1725.51,393.85 v1(1725.51,383.95) 1772.36,383.95 TP28_SG_Amp7.1@1790,366.31
  Bottom Layer w10: R24_SG_Amp7.2@1559.92,338.74 1550,348.67 C28_SG_Amp7.1@1550,396.9 1608.55,396.9 R20_SG_Amp7.1@1609.53,397.88 1617.91,406.26 1640.23,383.95 v1(1725.51,383.95)
RG_SG_Amp8: C28_SG_Amp8.1 IC5_SG_Amp8.6 R20_SG_Amp8.1 R24_SG_Amp8.2 TP28_SG_Amp8.1 | length 387.2
  Top Layer w10: IC5_SG_Amp8.6@1663.88,190.67 1708.69,190.67 1725.51,173.85 v1(1725.51,163.95) 1772.36,163.95 TP28_SG_Amp8.1@1790,146.31
  Bottom Layer w10: R24_SG_Amp8.2@1550,128.67 C28_SG_Amp8.1@1550,176.9 1608.55,176.9 R20_SG_Amp8.1@1609.53,177.88 1617.91,186.26 1640.23,163.95 v1(1725.51,163.95)
RXCAN: TEST_CANRX1.1 U2.6 U3.4
SG5V: C17.2 C24.2 IC5_SG_Amp1.8 IC5_SG_Amp2.8 IC5_SG_Amp3.8 IC5_SG_Amp4.8 IC5_SG_Amp5.8 IC5_SG_Amp6.8 IC5_SG_Amp7.8 IC5_SG_Amp8.8 J1.A27 J1.A28 J1.A29 J1.A30 TP45.1 U2.8 U2.9 U6.6 | length 794.6
  Top Layer w10: IC5_SG_Amp5.8@1662.24,900 1665.43,903.19 1682.15,903.19 v1(1703.37,924.41) ; IC5_SG_Amp4.8@1662.24,1120.07 1665.43,1123.26 1682.15,1123.26 v1(1703.37,1144.48) ; IC5_SG_Amp3.8@1662.24,1341.85 1665.43,1345.04 1682.15,1345.04 v1(1703.37,1366.26) ; IC5_SG_Amp1.8@1662.24,1777.99 1665.43,1781.18 1682.15,1781.18 v1(1703.37,1802.39) ; IC5_SG_Amp8.8@1663.88,241.85 1667.07,245.04 1683.79,245.04 v1(1705,266.26) ; IC5_SG_Amp7.8@1663.88,461.85 1667.07,465.04 1683.79,465.04 v1(1705,486.26) ; IC5_SG_Amp6.8@1664.17,680.07 1667.37,683.26 1684.08,683.26 v1(1705.3,704.48) ; IC5_SG_Amp2.8@1664.17,1560.07 1667.37,1563.26 1684.08,1563.26 v1(1705.3,1584.48) ; U2.9@3763.94,1826.38 U2.8@3783.63,1826.38
  Top Layer w15: U6.6@7406.38,923.58 7407.8,922.16 C17.2@7590,922.16 7592.16,920 TP45.1@7770,920
SG+1: IC5_SG_Amp1.3 J1.A10 TP14_SG_Amp1.1 | length 128.4
  Top Layer w15: TP14_SG_Amp1.1@1368.37,1725.98 1369.19,1726.81 IC5_SG_Amp1.3@1496.46,1726.81
SG+2: IC5_SG_Amp2.3 J1.A11 TP14_SG_Amp2.1 | length 128.4
  Top Layer w15: TP14_SG_Amp2.1@1370.3,1508.07 1371.12,1508.89 IC5_SG_Amp2.3@1498.39,1508.89
SG+3: IC5_SG_Amp3.3 J1.A12 TP14_SG_Amp3.1 | length 128.4
  Top Layer w15: TP14_SG_Amp3.1@1368.37,1289.85 1369.19,1290.67 IC5_SG_Amp3.3@1496.46,1290.67
SG+4: IC5_SG_Amp4.3 J1.A13 TP14_SG_Amp4.1 | length 128.4
  Top Layer w15: TP14_SG_Amp4.1@1368.37,1068.07 1369.19,1068.89 IC5_SG_Amp4.3@1496.46,1068.89
SG+5: IC5_SG_Amp5.3 J1.A14 TP14_SG_Amp5.1 | length 128.4
  Top Layer w15: TP14_SG_Amp5.1@1368.37,848 1369.19,848.82 IC5_SG_Amp5.3@1496.46,848.82
SG+6: IC5_SG_Amp6.3 J1.A15 TP14_SG_Amp6.1 | length 128.4
  Top Layer w15: TP14_SG_Amp6.1@1370.3,628.07 1371.12,628.89 IC5_SG_Amp6.3@1498.39,628.89
SG+7: IC5_SG_Amp7.3 J1.A16 TP14_SG_Amp7.1 | length 128.4
  Top Layer w15: TP14_SG_Amp7.1@1370,409.85 1370.83,410.67 IC5_SG_Amp7.3@1498.09,410.67
SG+8: IC5_SG_Amp8.3 J1.A9 TP14_SG_Amp8.1 | length 128.4
  Top Layer w15: TP14_SG_Amp8.1@1370,189.85 1370.83,190.67 IC5_SG_Amp8.3@1498.09,190.67
SG-1: IC5_SG_Amp1.2 J1.A1 TP5_SG_Amp1.1 | length 308.3
  Top Layer w10: TP5_SG_Amp1.1@1189.35,1749.6 1192.14,1752.4 IC5_SG_Amp1.2@1496.46,1752.4
SG-2: IC5_SG_Amp2.2 J1.A2 TP5_SG_Amp2.1 | length 308.3
  Top Layer w10: TP5_SG_Amp2.1@1191.28,1531.69 1194.08,1534.48 IC5_SG_Amp2.2@1498.39,1534.48
SG-3: IC5_SG_Amp3.2 J1.A3 TP5_SG_Amp3.1 | length 308.3
  Top Layer w10: TP5_SG_Amp3.1@1189.35,1313.47 1192.14,1316.26 IC5_SG_Amp3.2@1496.46,1316.26
SG-4: IC5_SG_Amp4.2 J1.A4 TP5_SG_Amp4.1 | length 308.3
  Top Layer w10: TP5_SG_Amp4.1@1189.35,1091.69 1192.14,1094.48 IC5_SG_Amp4.2@1496.46,1094.48
SG-5: IC5_SG_Amp5.2 J1.A5 TP5_SG_Amp5.1 | length 308.3
  Top Layer w10: TP5_SG_Amp5.1@1189.35,871.62 1192.14,874.41 IC5_SG_Amp5.2@1496.46,874.41
SG-6: IC5_SG_Amp6.2 J1.A6 TP5_SG_Amp6.1 | length 308.3
  Top Layer w10: TP5_SG_Amp6.1@1191.28,651.69 1194.08,654.48 IC5_SG_Amp6.2@1498.39,654.48
SG-7: IC5_SG_Amp7.2 J1.A7 TP5_SG_Amp7.1 | length 308.3
  Top Layer w10: TP5_SG_Amp7.1@1190.98,433.47 1193.78,436.26 IC5_SG_Amp7.2@1498.09,436.26
SG-8: IC5_SG_Amp8.2 J1.A8 TP5_SG_Amp8.1 | length 308.3
  Top Layer w10: TP5_SG_Amp8.1@1190.98,213.47 1193.78,216.26 IC5_SG_Amp8.2@1498.09,216.26
SGO1: C28_SG_Amp1.2 IC5_SG_Amp1.7 R20_SG_Amp1.2 TP30_SG_Amp1.1 U2.25 | length 316
  Top Layer w10: IC5_SG_Amp1.7@1662.24,1752.4 v1@1728.37,1752.4 ; v1@1733.06,1757.09 v1@1728.37,1752.4 ; TP30_SG_Amp1.1@1780.8,1759.97 1773.23,1752.4 v1(1733.06,1752.4) v1@1728.37,1752.4
  Bottom Layer w10: C28_SG_Amp1.2@1548.37,1766.18 1549.35,1765.19 R20_SG_Amp1.2@1607.89,1765.19 ; R20_SG_Amp1.2@1618.37,1769.13 1719.69,1769.13 1719.69,1768.26 1733.06,1754.89 v1(1733.06,1752.4)
  Bottom Layer w15: R20_SG_Amp1.2@1615.41,1766.18 R20_SG_Amp1.2@1618.37,1769.13
SGO2: C28_SG_Amp2.2 IC5_SG_Amp2.7 R20_SG_Amp2.2 TP30_SG_Amp2.1 U2.26 | length 316
  Top Layer w10: IC5_SG_Amp2.7@1664.17,1534.48 v1@1730.3,1534.48 ; v1@1734.99,1539.18 v1@1730.3,1534.48 ; TP30_SG_Amp2.1@1782.73,1542.05 1775.16,1534.48 v1(1734.99,1534.48) v1@1730.3,1534.48
  Bottom Layer w10: C28_SG_Amp2.2@1550.3,1548.27 1551.28,1547.28 R20_SG_Amp2.2@1609.82,1547.28 ; R20_SG_Amp2.2@1620.3,1551.22 1721.62,1551.22 1721.62,1550.34 1734.99,1536.97 v1(1734.99,1534.48)
  Bottom Layer w15: R20_SG_Amp2.2@1617.34,1548.27 R20_SG_Amp2.2@1620.3,1551.22
SGO3: C28_SG_Amp3.2 IC5_SG_Amp3.7 R20_SG_Amp3.2 TP30_SG_Amp3.1 U2.27 | length 316
  Top Layer w10: IC5_SG_Amp3.7@1662.24,1316.26 v1@1728.37,1316.26 ; v1@1733.06,1320.96 v1@1728.37,1316.26 ; TP30_SG_Amp3.1@1780.8,1323.83 1773.23,1316.26 v1(1733.06,1316.26) v1@1728.37,1316.26
  Bottom Layer w10: C28_SG_Amp3.2@1548.37,1330.05 1549.35,1329.06 R20_SG_Amp3.2@1607.89,1329.06 ; R20_SG_Amp3.2@1618.37,1333 1719.69,1333 1719.69,1332.12 1733.06,1318.75 v1(1733.06,1316.26)
  Bottom Layer w15: R20_SG_Amp3.2@1615.41,1330.05 R20_SG_Amp3.2@1618.37,1333
SGO4: C28_SG_Amp4.2 IC5_SG_Amp4.7 R20_SG_Amp4.2 TP30_SG_Amp4.1 U2.28 | length 316
  Top Layer w10: IC5_SG_Amp4.7@1662.24,1094.48 v1@1728.37,1094.48 ; v1@1733.06,1099.18 v1@1728.37,1094.48 ; TP30_SG_Amp4.1@1780.8,1102.05 1773.23,1094.48 v1(1733.06,1094.48) v1@1728.37,1094.48
  Bottom Layer w10: C28_SG_Amp4.2@1548.37,1108.27 1549.35,1107.28 R20_SG_Amp4.2@1607.89,1107.28 ; R20_SG_Amp4.2@1618.37,1111.22 1719.69,1111.22 1719.69,1110.34 1733.06,1096.97 v1(1733.06,1094.48)
  Bottom Layer w15: R20_SG_Amp4.2@1615.41,1108.27 R20_SG_Amp4.2@1618.37,1111.22
SGO5: C28_SG_Amp5.2 IC5_SG_Amp5.7 R20_SG_Amp5.2 TP30_SG_Amp5.1 U2.29 | length 316
  Top Layer w10: IC5_SG_Amp5.7@1662.24,874.41 v1@1728.37,874.41 ; v1@1733.06,879.11 v1@1728.37,874.41 ; TP30_SG_Amp5.1@1780.8,881.98 1773.23,874.41 v1(1733.06,874.41) v1@1728.37,874.41
  Bottom Layer w10: C28_SG_Amp5.2@1548.37,888.2 1549.35,887.21 R20_SG_Amp5.2@1607.89,887.21 ; R20_SG_Amp5.2@1618.37,891.15 1719.69,891.15 1719.69,890.27 1733.06,876.9 v1(1733.06,874.41)
  Bottom Layer w15: R20_SG_Amp5.2@1615.41,888.2 R20_SG_Amp5.2@1618.37,891.15
SGO6: C28_SG_Amp6.2 IC5_SG_Amp6.7 R20_SG_Amp6.2 TP30_SG_Amp6.1 U2.30 | length 316
  Top Layer w10: IC5_SG_Amp6.7@1664.17,654.48 v1@1730.3,654.48 ; v1@1734.99,659.18 v1@1730.3,654.48 ; TP30_SG_Amp6.1@1782.73,662.05 1775.16,654.48 v1(1734.99,654.48) v1@1730.3,654.48
  Bottom Layer w10: C28_SG_Amp6.2@1550.3,668.27 1551.28,667.28 R20_SG_Amp6.2@1609.82,667.28 ; R20_SG_Amp6.2@1620.3,671.22 1721.62,671.22 1721.62,670.34 1734.99,656.97 v1(1734.99,654.48)
  Bottom Layer w15: R20_SG_Amp6.2@1617.34,668.27 R20_SG_Amp6.2@1620.3,671.22
SGO7: C28_SG_Amp7.2 IC5_SG_Amp7.7 R20_SG_Amp7.2 TP30_SG_Amp7.1 U2.31 | length 316
  Top Layer w10: IC5_SG_Amp7.7@1663.88,436.26 v1@1730,436.26 ; v1@1734.69,440.96 v1@1730,436.26 ; TP30_SG_Amp7.1@1782.43,443.83 1774.86,436.26 v1(1734.69,436.26) v1@1730,436.26
  Bottom Layer w10: C28_SG_Amp7.2@1550,450.05 1550.99,449.06 R20_SG_Amp7.2@1609.53,449.06 ; R20_SG_Amp7.2@1620,453 1721.32,453 1721.32,452.12 1734.69,438.75 v1(1734.69,436.26)
  Bottom Layer w15: R20_SG_Amp7.2@1617.05,450.05 R20_SG_Amp7.2@1620,453
SGO8: C28_SG_Amp8.2 IC5_SG_Amp8.7 R20_SG_Amp8.2 TP30_SG_Amp8.1 U2.32 | length 316
  Top Layer w10: IC5_SG_Amp8.7@1663.88,216.26 v1@1730,216.26 ; v1@1734.69,220.96 v1@1730,216.26 ; TP30_SG_Amp8.1@1782.43,223.83 1774.86,216.26 v1(1734.69,216.26) v1@1730,216.26
  Bottom Layer w10: C28_SG_Amp8.2@1550,230.05 1550.99,229.06 R20_SG_Amp8.2@1609.53,229.06 ; R20_SG_Amp8.2@1620,233 1721.32,233 1721.32,232.12 1734.69,218.75 v1(1734.69,216.26)
  Bottom Layer w15: R20_SG_Amp8.2@1617.05,230.05 R20_SG_Amp8.2@1620,233
SPLIT: C11.2 R12.2 R13.1 U3.5 | length 649.1
  Top Layer w10: U3.5@3892.17,3323.43 3951.57,3323.43 3970.31,3304.69 3970.31,3302.72 3983.03,3290 3986.81,3293.78 R12.2@4070.47,3293.78 4070,3293.31 v1(4070,3230) ; v1(4070,3565) 4070.47,3564.53 R13.1@4070.47,3509.96
  Bottom Layer w10: v1(4070,3230) v1(4070,3565)
STBY: R8.2 U3.8 | length 128.2
  Top Layer w10: 3815.59,3545 3858.11,3545 3890,3513.11 3890,3475.59 U3.8@3892.17,3473.43
TC+1: J1.A18 R10_U_ThermoAmp1.2 R11_U_ThermoAmp1.2 TP39_U_ThermoAmp1.1 | length 271.2
  Top Layer w10: TP39_U_ThermoAmp1.1@1445.89,2649.41 R10_U_ThermoAmp1.2@1635.89,2649.41 1710.89,2649.41 R11_U_ThermoAmp1.2@1715.3,2645
TC+2: J1.A20 R10_U_ThermoAmp2.2 R11_U_ThermoAmp2.2 TP39_U_ThermoAmp2.1 | length 271.2
  Top Layer w10: TP39_U_ThermoAmp2.1@1445.89,2196.85 R10_U_ThermoAmp2.2@1635.89,2196.85 1710.89,2196.85 R11_U_ThermoAmp2.2@1715.3,2192.44
TC-1: J1.A19 R6_U_ThermoAmp1.1 TP38_U_ThermoAmp1.1 | length 129.4
  Top Layer w15: TP38_U_ThermoAmp1.1@1280.89,2491.57 R6_U_ThermoAmp1.1@1410.3,2491.57
TC-2: J1.A21 R6_U_ThermoAmp2.1 TP38_U_ThermoAmp2.1 | length 129.4
  Top Layer w15: TP38_U_ThermoAmp2.1@1280.89,2039.02 R6_U_ThermoAmp2.1@1410.3,2039.02
TCO1: TP42_U_ThermoAmp1.1 U2.20 U4_U_ThermoAmp1.5 U4_U_ThermoAmp1.6 | length 135.3
  Top Layer w15: U4_U_ThermoAmp1.6@1824.05,2446.94 1823.78,2446.67 U4_U_ThermoAmp1.5@1823.78,2421.61 1924.28,2421.61 TP42_U_ThermoAmp1.1@1930.89,2415
TCO2: TP42_U_ThermoAmp2.1 U2.21 U4_U_ThermoAmp2.5 U4_U_ThermoAmp2.6 | length 135.3
  Top Layer w15: U4_U_ThermoAmp2.6@1824.05,1994.38 1823.78,1994.11 U4_U_ThermoAmp2.5@1823.78,1969.06 1924.28,1969.06 TP42_U_ThermoAmp2.1@1930.89,1962.44
TRIM: C14.2 U5.5 | length 161.1
  Top Layer w15: C14.2@6879.17,1177.01 6932.32,1177.01 6959.88,1204.57 U5.5@6959.88,1273.58
TXCAN: TEST_CANTX1.1 U2.5 U3.1
VCC_3V3: C20.2 U7.17 | length 132.7
  Bottom Layer w10: U7.17@5437.85,1351.18 U7.17@5440,1351.18 ; U7.17@5442.61,1348.57 U7.17@5440,1351.18 ; C20.2@5550,1313.15 5548.03,1313.15 5535.31,1325.87 5535.31,1327.83 5511.97,1351.18 U7.17@5440,1351.18
VCC_OK: D4.1 R14.2 | length 130.6
  Top Layer w15: R14.2@8292.99,994.25 D4.1@8423.58,994.26
pads on no net: IC9.1 IC9.3 IC9.5 IC9.7 IC9.8 J1.MH J2.4 J2.6 J2.7 J2.8 J2.9 J2.10 J2.11 P1.7 P1.9 P1.MH1 P1.MH2 U4_U_ThermoAmp1.4 U4_U_ThermoAmp2.4 U5.1 U5.3 U5.7 U5.8 U6.1 U6.3 U6.7 U6.8 U7.3 U7.6 U7.8 U7.9 U7.10 U7.11 U7.12 U7.13 U7.14 U7.24 U7.27 U7.28

## Polygon pours and split planes (outlines as drawn)
DGND on Int1 (GND) "Int1 (GND)-DGND" (none, remove dead copper, pour order 6): 6000,0 6000,2800 3200,2800 3200,0
AGND on Int1 (GND) "Int1 (GND)-AGND" (none, remove dead copper, pour order 0): 0,0 0,2800 2700,2800 2700,0
DVCC_5V on Int2 (PWR) "Int2 (PWR)-VCC 1" (none, remove dead copper, pour order 8): 6000,0 6000,2800 3200,2800 3200,0
SG5V on Int2 (PWR) "Int2 (PWR)-SG5V" (none, remove dead copper, pour order 12): 0,0 2700,0 2700,2800 0,2800
DVCC_5V on Int2 (PWR) "Int2 (PWR)-VCC" (none, remove dead copper, pour order 10): 84.88,0

## Text inside footprints (layer, text, board x,y; h text height)
D1: Top Overlay "*" at 5242.48,1504.13 h60 r270
D3: Top Overlay "*" at 5320,1504.13 h60 r270
D4: Top Overlay "*" at 8528.85,1014.26 h60
POWER1: Top Overlay "*" at 655.47,3142 h60 r180